# EAGLE board Sensor_Module_0x08_Dual_Temperatures_2xDS18B20_v1 (EAGLE 9.1.1)
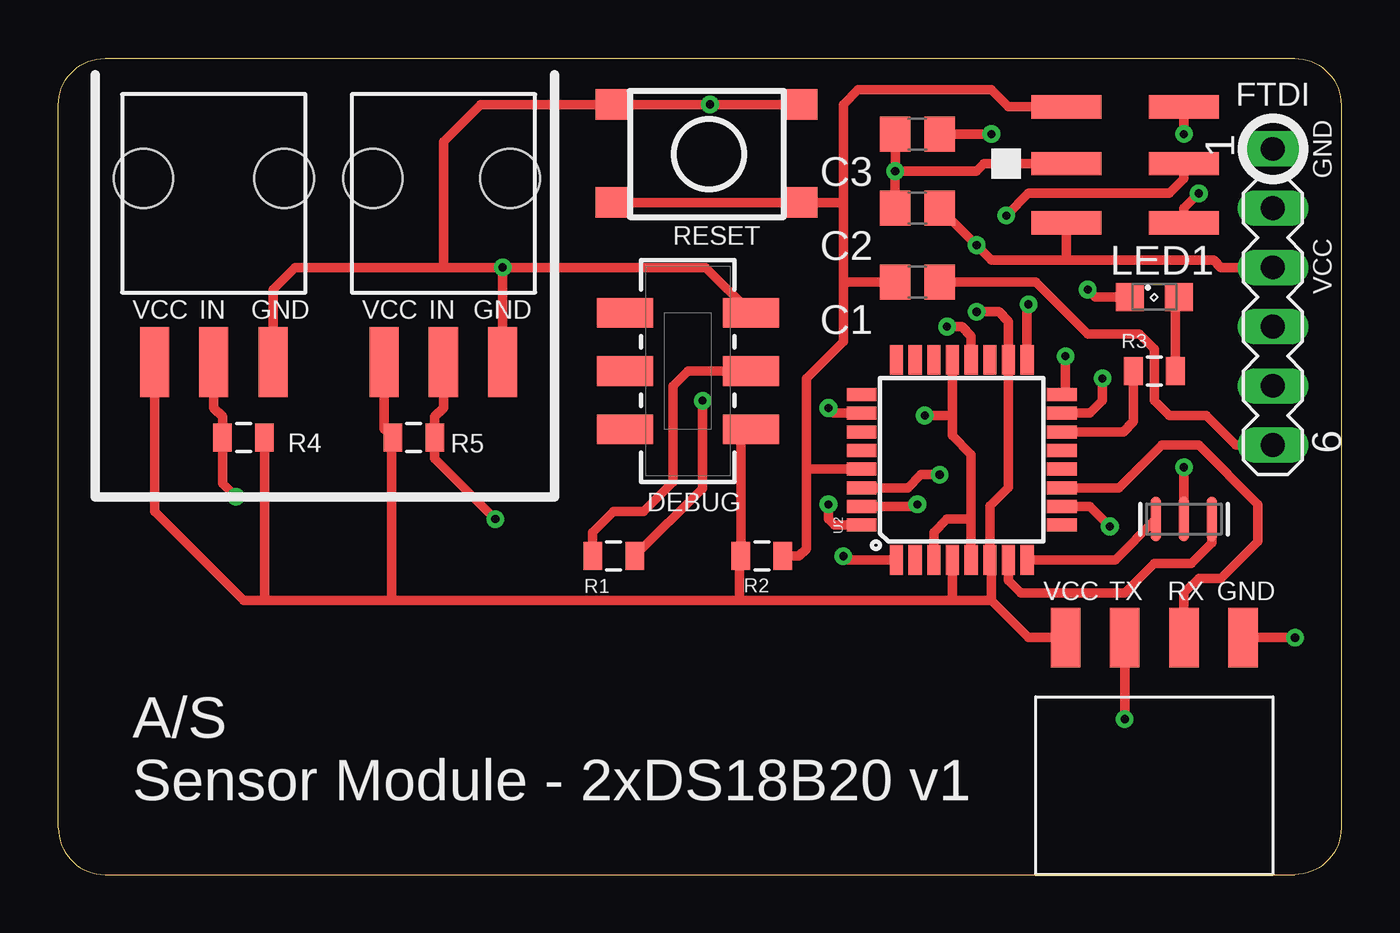
[diagram p0: board, top side]
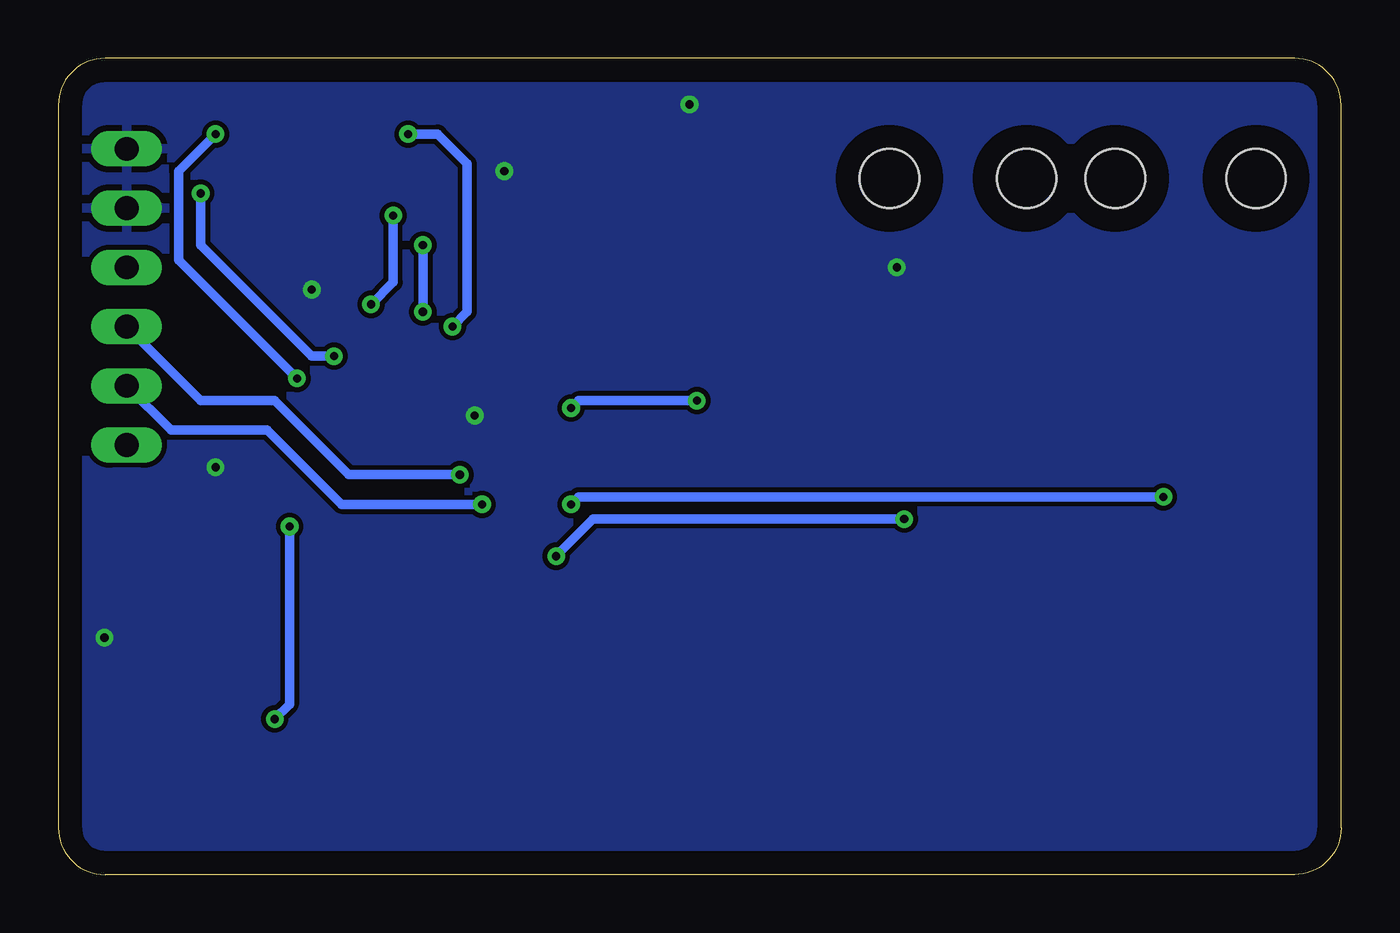
[diagram p1: board, bottom side, seen from below]

Size 55 x 35 mm. Coordinates in mm from the lower left corner, seen from the top.
Outline: 55,33 55,2 arc-90 53,0 2,0 arc-90 0,2 0,33 arc-90 2,35 53,35 arc-90 55,33
Copper layers (1*16): Top 0.035mm / dielectric 1.5mm / Bottom 0.035mm
Design rules "default *": minimum track width 10mil, minimum drill 24mil, track to track 8mil, track to pad 8mil, pad to pad 8mil, via to via 8mil, smd to smd 8mil, copper to edge 40mil, drill to drill 8mil, minimum pad ring 10mil, minimum via ring 8mil, stop-mask expansion 4mil, vias tented up to drill 0mil, thermal gap 10mil
Net classes: 0 default: width 0.3 mm; 1 Vsupply: width 0.5 mm; 5 GND: width 0.5 mm
Holes 2.54 mm at 19.37,29.84 9.68,29.84 3.65,29.84 13.49,29.84

## Footprints (pad centres in the part's own frame; a part is rotated, then mirrored left to right if it is on the bottom)
C0805 = smd 1.3 x 1.5: 1 -0.95,0; 2 0.95,0
1X03_SMD_RA_FEMALE = smd 1.25 x 3: 1 -2.54,7.225; 2 0,7.225; 3 2.54,7.225
M-2X3 = smd 1 x 3: P$1 0,0; P$2 2.54,0; P$3 4.98,0; P$4 4.98,5.05; P$5 2.54,5.05; P$6 0,5.05
SML0805 = smd 1.2 x 1.2: A 1.05,0; C -1.05,0
0805 = smd 0.8 x 1.2: 1 -0.9,0; 2 0.9,0
M-PUSHBUTTON-SMD = smd 1.55 x 1.3: 1 0,0; 2 7.95,0; 3 0,-4.2; 4 7.95,-4.2
JS202011SCQN = smd 1.27 x 2.4: 1 -2.5,-2.7; 2 0,-2.7; 3 2.5,-2.7; 4 -2.5,2.7; 5 0,2.7; 6 2.5,2.7
MA06-1 = drill 1.016 long: 1 -6.35,0; 2 -3.81,0; 3 -1.27,0; 4 1.27,0; 5 3.81,0; 6 6.35,0
TQFP32-08 = smd 1.27 x 0.559: 1 -4.293,2.8; 2 -4.293,2; 3 -4.293,1.2; 4 -4.293,0.4; 5 -4.293,-0.4; 6 -4.293,-1.2; 7 -4.293,-2; 8 -4.293,-2.8; 17 4.293,-2.8; 18 4.293,-2; 19 4.293,-1.2; 20 4.293,-0.4; 21 4.293,0.4; 22 4.293,1.2; 23 4.293,2; 24 4.293,2.8 | smd 0.559 x 1.27: 9 -2.8,-4.293; 10 -2,-4.293; 11 -1.2,-4.293; 12 -0.4,-4.293; 13 0.4,-4.293; 14 1.2,-4.293; 15 2,-4.293; 16 2.8,-4.293; 25 2.8,4.293; 26 2,4.293; 27 1.2,4.293; 28 0.4,4.293; 29 -0.4,4.293; 30 -1.2,4.293; 31 -2,4.293; 32 -2.8,4.293
M04_SMD_90 = smd 1.27 x 2.54: 1 0,0; 2 2.54,0; 3 5.08,0; 4 7.62,0
RESONATOR-SMD = smd 0.45 x 1.905: 1 -1.2,0; 2 0,0; 3 1.2,0

## Placement (x,y rotation side)
C1  100n  [C0805]  36.83,25.4 180 top
C2  100n  [C0805]  36.83,28.57 180 top
C3  100n  [C0805]  36.83,31.75 180 top
J2  1x3 RA Female .1"  [1X03_SMD_RA_FEMALE]  16.51,29.21 180 top
J3  1x3 RA Female .1"  [1X03_SMD_RA_FEMALE]  6.67,29.21 180 top
J4  ARDUINO_ISP  [M-2X3]  48.26,27.94 90 top
LED1  Red  [SML0805]  46.99,24.77 0 top
R1  10k  [0805]  23.81,13.65 0 top
R2  10k  [0805]  30.16,13.65 180 top
R3  330  [0805]  46.99,21.59 180 top
R4  4.7k  [0805]  7.94,18.73 0 top
R5  4.7k  [0805]  15.24,18.73 180 top
S1  Reset  [M-PUSHBUTTON-SMD]  23.81,33.02 0 top
S3  JS202011SCQN  [JS202011SCQN]  26.99,21.59 90 top
SV1  [MA06-1]  52.07,24.77 270 top
U2  ATMEGA328P_TQFP  [TQFP32-08]  38.73,17.78 90 top
U$1  M04_SMD_90  [M04_SMD_90]  43.18,10.16 0 top
Y1  8MHZ  [RESONATOR-SMD]  48.26,15.24 180 top

## Library data of the parts
C1-C3 = eagle-ltspice; SPICEMODEL: NONE; SPICEPREFIX: C
J2 J3 = SparkFun-Connectors; PROD_ID: CONN-10926
J4 S1 = marc_library
LED1 = led
R1-R5 = SparkFun-Passives
S3 U$1 = myownthings
SV1 = con-lstb; OC_FARNELL: unknown; OC_NEWARK: unknown
U2 = marc_library; PROD_ID: IC-09069
Y1 = marc_library; PROD_ID: XTAL-08895

## Nets
DBG_ENABLE: R1.2 U2.26
DS18B20_DATA_1: J3.2 R4.1 U2.32
DS18B20_DATA_2: J2.2 R5.1 U2.1
FTDI_RESET: C1.1 SV1.6
FTDI_RXI: SV1.4 U2.30
FTDI_TXO: SV1.5 U2.31
GND [GND]: C2.2 C3.2 J2.1 J3.1 J4.P$5 LED1.C S1.1 S1.2 S3.3 SV1.1 SV1.2 U2.3 U2.5 U2.21 U$1.4 Y1.2
L1: R3.2 U2.14
MCU_RXI: U2.11 U$1.3
MCU_TXO: U2.10 U$1.2
MISO: J4.P$1 U2.16
MOSI: J4.P$3 U2.15
N$1: U2.8 Y1.3
N$2: U2.7 Y1.1
N$3: R1.1 S3.2
N$15: C3.1 U2.20
N$30: LED1.A R3.1
RESET: C1.2 J4.P$4 R2.1 S1.3 S1.4 U2.29
SCK: J4.P$2 U2.17
VCC [Vsupply]: C2.1 J2.3 J3.3 J4.P$6 R2.2 R4.2 R5.2 S3.1 SV1.3 U2.4 U2.6 U2.18 U$1.1

## Tracks (layer width: path | path; a pad name or v marks a point on that pad's centre or on a via)
DBG_ENABLE  (via drill 0.35)
  Top 0.406: R1.2 27.62,16.56 v27.62,20.32 | U2.26 33.24,19.78 v33.02,20
  Bottom 0.406: v27.62,20.32 32.7,20.32 v33.02,20
DS18B20_DATA_1  (via drill 0.35)
  Top 0.406: v7.62,16.19 7.04,16.77 R4.1 7.04,19.63 6.67,20 J3.2 | U2.32 33.28,14.98 33.02,15.24 v33.02,15.88
  Bottom 0.406: v7.62,16.19 32.7,16.19 v33.02,15.88
DS18B20_DATA_2  (via drill 0.35)
  Top 0.406: v18.73,15.24 16.14,17.83 R5.1 16.14,19.63 16.51,20 J2.2 | v33.66,13.65 33.82,13.49 U2.1
  Bottom 0.406: v18.73,15.24 32.07,15.24 v33.66,13.65
FTDI_RESET
  Top 0.406: C1.1 41.91,25.4 44.13,23.18 46.35,23.18 46.99,22.54 46.99,20.32 47.62,19.68 49.21,19.68 50.48,18.41 SV1.6
FTDI_RXI  (via drill 0.35)
  Top 0.406: U2.30 36.42,16.58 36.99,17.14 v37.78,17.14
  Bottom 0.406: SV1.4 48.9,20.32 45.72,20.32 42.55,17.14 v37.78,17.14
FTDI_TXO  (via drill 0.35)
  Top 0.406: U2.31 36.73,15.78 v36.83,15.88
  Bottom 0.406: SV1.5 50.16,19.05 46.04,19.05 42.86,15.88 v36.83,15.88
GND  (via drill 0.35)
  Top 0.406: Y1.2 v48.26,17.46 | v53.02,10.16 U$1.4 | S1.2 v27.94,33.02 S1.1 18.1,33.02 16.51,31.43 16.51,26.04 | J3.1 9.21,25.08 10.16,26.04 16.51,26.04 | J4.P$5 39.69,30.48 39.37,30.16 v35.88,30.16 | v44.13,25.08 44.45,24.77 LED1.C | 38.34,19.68 38.34,18.82 39.13,18.02 39.13,15.24 | 38.34,19.68 U2.21 | 39.13,15.24 U2.5 | U2.3 37.53,14.68 38.1,15.24 39.13,15.24 | 38.34,19.68 v37.15,19.68 | S3.3 27.74,26.04 v19.05,26.04 | 16.51,26.04 v19.05,26.04 | v19.05,26.04 J2.1 | C3.2 v35.88,30.16 | v35.88,30.16 C2.2
  pour Bottom: 55,33 55,2 arc-90 53,0 2,0 arc-90 0,2 0,33 arc-90 2,35 53,35 arc-90
L1
  Top 0.406: R3.2 46.09,19.42 45.65,18.98 U2.14
MCU_RXI
  Top 0.406: U2.11 45.47,16.58 47.31,18.41 48.9,18.41 51.44,15.88 51.44,14.29 49.85,12.7 48.9,12.7 48.26,12.06 U$1.3
MCU_TXO  (via drill 0.35)
  Top 0.406: U2.10 44.23,15.78 v45.09,14.92 | v45.72,6.67 U$1.2
  Bottom 0.406: v45.09,14.92 45.09,7.3 v45.72,6.67
MISO  (via drill 0.35)
  Top 0.406: U2.16 43.18,20.73 v43.18,22.23 | v48.9,29.21 48.26,28.57 J4.P$1
  Bottom 0.406: v48.9,29.21 48.9,26.99 44.13,22.23 v43.18,22.23
MOSI  (via drill 0.35)
  Top 0.406: J4.P$3 v48.26,31.75 | v44.77,21.27 44.77,20.32 44.23,19.78 U2.15
  Bottom 0.406: v48.26,31.75 49.85,30.16 49.85,26.35 v44.77,21.27
N$1
  Top 0.406: Y1.3 45.31,13.49 U2.8
N$2
  Top 0.406: Y1.1 49.46,14.22 48.58,13.34 46.99,13.34 45.72,12.06 41.27,12.06 40.73,12.61 U2.7
N$3
  Top 0.406: R1.1 22.91,14.66 23.81,15.56 25.08,15.56 26.35,16.83 26.35,20.95 26.99,21.59 S3.2
N$15  (via drill 0.35)
  Top 0.406: C3.1 v40.01,31.75 | U2.20 39.13,23.09 38.73,23.5 v38.1,23.5
  Bottom 0.406: v40.01,31.75 38.73,31.75 37.47,30.48 37.47,24.13 v38.1,23.5
N$30
  Top 0.406: R3.1 47.89,24.61 LED1.A
RESET
  Top 0.406: J4.P$4 40.74,32.92 40.01,33.66 34.29,33.66 33.66,33.02 33.66,28.89 | 33.66,28.89 33.66,25.4 | 33.66,25.4 33.66,22.86 32.07,21.27 32.07,17.46 | C1.2 33.66,25.4 | S1.3 S1.4 33.58,28.82 33.66,28.89 | R2.1 31.75,13.65 32.07,13.97 32.07,17.46 | U2.29 32.15,17.38 32.07,17.46
SCK  (via drill 0.35)
  Top 0.406: U2.17 41.53,24.39 v41.59,24.45 | v40.64,28.26 41.59,29.21 47.62,29.21 48.26,29.84 J4.P$2
  Bottom 0.406: v41.59,24.45 40.64,25.4 v40.64,28.26
VCC  (via drill 0.35)
  Top 0.406: 43.18,26.35 40,26.35 v39.37,26.98 v39.37,26.99 C2.1 | 43.18,26.35 49.53,26.35 49.85,26.04 SV1.3 | J4.P$6 43.21,26.38 43.18,26.35 | v39.37,24.13 40.32,24.13 40.73,23.72 U2.18 40.73,16.61 39.94,15.8 U2.6 40.01,13.42 40.01,11.75 | U$1.1 41.59,10.16 40.01,11.75 | 29.21,11.75 14.29,11.75 | 38.42,11.75 29.21,11.75 | 38.42,11.75 40.01,11.75 | 14.29,11.75 14.29,18.68 R5.2 13.97,19.1 J2.3 | 29.21,11.75 29.21,13.6 R2.2 29.26,18.66 S3.1 | J3.3 4.13,15.56 7.94,11.75 8.89,11.75 | 8.89,11.75 14.29,11.75 | R4.2 8.84,11.8 8.89,11.75 | U2.4 38.34,11.83 38.42,11.75
  Bottom 0.406: v39.37,26.99 v39.37,24.13

## Text on the board
tPlace: FTDI | GND | RESET | VCC | VCC | IN | GND | VCC | IN | GND | DEBUG | VCC | TX | RX | GND | A/S / Sensor Module - 2xDS18B20 v1